# Altium PCB PowerConverterPCB.PcbDoc
Units mil, origin at the board's own origin, x right, y up, seen from the top; angles counter-clockwise.
Board outline 965 x 350 mil, 2 copper layers (Top Layer, Bottom Layer); 5 components, 3 nets, 17 pads, 5 vias.
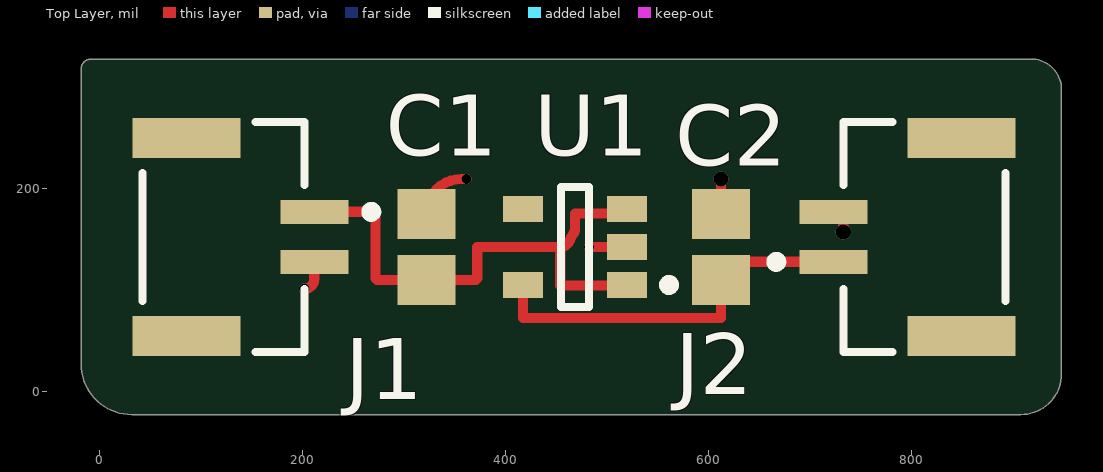
[diagram p0: Top Layer view]
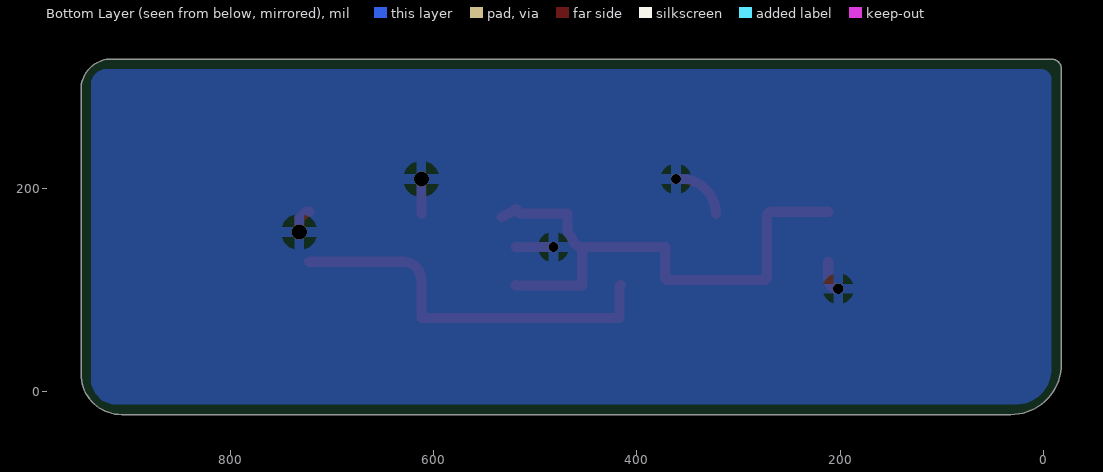
[diagram p1: Bottom Layer view, seen from below]
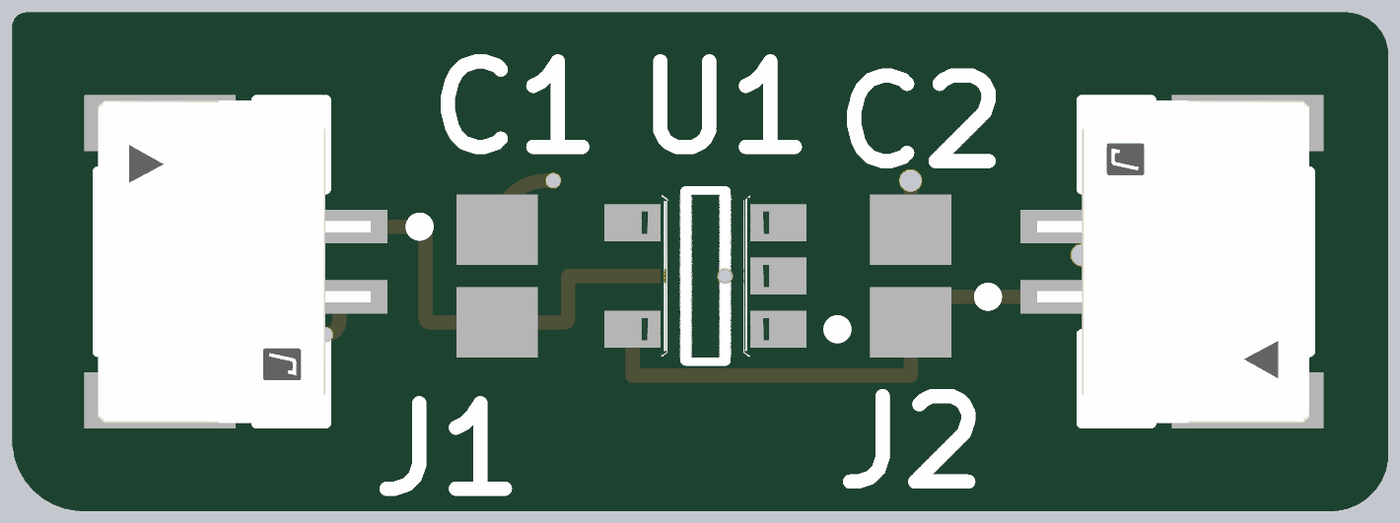
[diagram p2: 3D render of the assembled board from above, using the file's embedded part models]

## Layer stack, top to bottom
Top Solder: solder mask 0.4, Solder Resist, Dk 3.5
Top Layer: signal copper 1.4
Dielectric 1: dielectric 12.6, FR-4, Dk 4.8
Bottom Layer: signal copper 1.4
Bottom Solder: solder mask 0.4, Solder Resist, Dk 3.5

## Board outline
-17.81,27.31 ccw(c32.19,27.31) 32.19,-22.69 907.19,-22.69 ccw(c907.19,17.31) 947.19,17.31 947.19,297.31 ccw(c917.19,297.31) 917.19,327.31 -7.81,327.31 ccw(c-7.81,317.31) -17.81,317.31

## Design rules (kind name [scope] priority, off if disabled: settings)
Clearance [All] p1: gap=10 ignorepadtopadclearanceinfootprint=FALSE
PolygonConnect [All] p1: connectstyle=Relief reliefconductorwidth=10 reliefentries=4 polygonreliefangle="90 Angle" airgapwidth=10
RoutingVias [All] p1: holewidth=28 width=50 viastyle="Through Hole" minholewidth=28 minwidth=50 maxholewidth=28 maxwidth=50
SolderMaskExpansion [All] p1: expansion=0 istentingtop=FALSE
SupplyNets "Schematic Supply Nets_2" [InNet('+5v')] p1: voltage=0.000
SupplyNets "Schematic Supply Nets_1" [InNet('GND')] p2: voltage=0.000
SupplyNets "Schematic Supply Nets" [InNet('+3.3v')] p3: voltage=0.000
Width [All] p1: maxlimit=10 minlimit=10 preferedwidth=10
30 further rules are at their usual default settings.

## Components (designator, comment, footprint, x,y, rotation, side; value= is the part's Value field where it differs from the comment)
C1 "1uf" CAPC2013X145X50NL20T20 322.19,142.31 r270 top
C2 "1uf" CAPC2013X145X50NL20T20 612.19,142.31 r270 top
J1 "SM02B-GHS-TB(LF)(SN)" FP-SM02B-GHS-TB_LF_SN-MFG 122.19,152.31 r270 top
J2 "SM02B-GHS-TB(LF)(SN)" FP-SM02B-GHS-TB_LF_SN-MFG 812.19,152.31 r90 top
U1 "MIC5317-3.3YM5-TR" FP-SOT23-5LD-PL-1-MFG 468.39,142.31 r180 top

## Footprints (in the part's own frame and the unit in brackets; to place one, negate y for a bottom-side part, rotate by r counter-clockwise, add the part's x,y. Pads: shape width x height; smd on the part's side, far side on the other; paste and mask are expansions set on the pad)
CAPC2013X145X50NL20T20 [mm] "Chip Capacitor, 2-Leads, Body 2.00x1.25mm, IPC Medium Density"
  rect 1.25x1.45 smd: 1(-0.825,0) 2(0.825,0)
  body extent -1.1,-0.72 1.1,0.72, height 1.45
FP-SM02B-GHS-TB_LF_SN-MFG [mm]
  rect 0.6x1.7 smd paste+0 mask+0: 1(-0.625,2.275) 2(0.625,2.275)
  rect 1x2.7 smd paste+0 mask+0: 3(-2.475,-0.925) 4(2.475,-0.925)
  silkscreen extent -2.88,-2.02 2.88,3.83, body extent -3.08,-2.37 3.08,3.22, height 0.25
FP-SOT23-5LD-PL-1-MFG [mm]
  rect 1x0.66 smd paste+0 mask+0: 1(-1.3,0.95) 2(-1.3,0) 3(-1.3,-0.95) 4(1.3,-0.95) 5(1.3,0.95)
  silkscreen extent -2.48,-1.5 0.35,1.5, body extent -1.9,-1.6 1.9,1.6, height 0.25

## Part data
C1 C2: library part CMP-2007-01676-1, Manufacturer=Vitramon, Part Number=1uf
J1 J2: library part CMP-2000-07076-2, "CONN HEADER SMD R/A 2POS 1.25MM", Color=Natural, Current Rating=1A, Package Quantity=2500, Voltage Rating=50V, Connector Type="Outer Shroud Contact", Contact Material=Bronze, Contact Plating=Tin, Contact Type="Male Pin", Fastening Type=Latch, Housing Color=Natural, Housing Material=Nylon, Lead Free="Lead Free", Mount="Surface Mount", Number of Contacts=2, Number of Positions=2, Number of Rows=1, Orientation="Right Angle", Packaging="Tape and Reel", Pitch=0.049inch, Series=GH, Termination=Solder
U1: library part CMP-06324-000116-1, "IC REG LINEAR 3.3V 150MA SOT23-5", Case/Package=SOT-23-5, Dropout Voltage=155mV, Max Input Voltage=6V, Max Operating Temperature=125°C, Min Current Limit=200mA, Min Input Voltage=2.5V, Min Operating Temperature=-40°C, Output Current=150mA, Output Voltage=3.3V, Package Quantity=3000, Power Supply Rejection Ratio (PSRR)=70dB, Mount="Surface Mount", Number of Outputs=1, Number of Regulators=1, Packaging="Tape and Reel", RoHS Compliant=No, Series=-

## Via types
v1: diameter 10, hole 10, Top Layer to Bottom Layer, 3 vias
v2: diameter 15, hole 15, Top Layer to Bottom Layer, 2 vias

## Nets (pads, with @x,y where several pads share a name; then routed paths per layer and width w, separated by ;. In a path a pad name is that pad's centre, name@x,y a point inside that pad or via, vN(x,y) a via of type N, cw(c..) or ccw(c..) an arc to the next point about the centre after c; other vN are vias at no path point)
+3.3v: C2.2 J2.1 U1.5 | length 386.4
  Top Layer w10: U1.5@416.01,104.91 cw(c416.01,103.73) 417.19,103.73 417.19,72.31 612.19,72.31 C2.2 cw(c630.06,109.83) 630.06,127.7 J2.1
+5v: C1.2 J1.1 U1.1 U1.3 | length 551.1
  Top Layer w10: J1.1 267.19,176.92 267.19,177.31 cw(c267.19,172.31) 272.19,172.31 272.19,112.31 ccw(c274.67,112.31) 274.67,109.83 C1.2 369.71,109.83 ccw(c369.71,112.31) 372.19,112.31 372.19,142.31 453.89,142.31 ; U1.1 519.57,104.53 453.89,104.53 453.89,142.31 ; U1.3@533.05,171.72 518.37,179.71 cw(c513.78,179.71) 513.78,175.12 468.39,175.12 468.39,160.6 cw(c458.39,160.6) 466.32,154.51 ccw(c482.17,142.31) 463.32,149 cw(c453.89,152.31) 453.89,142.31
GND: C1.1 C2.1 J1.2 J2.2 U1.2 | length 188.8
  Top Layer w10: v1(201.91,101.13) ccw(c201.91,110.97) 211.75,110.97 J1.2 ; C1.1 cw(c356.64,174.79) 356.64,209.24 v1(361.56,209.24) ; v1(482.17,142.31) U1.2 ; C2.1 v2(612.19,209.24) ; J2.2 725.65,176.92 732.46,170.11 v2(732.46,157.02)
pads on no net: J1.3 J1.4 J2.3 J2.4 U1.4

## Polygon pours and split planes (outlines as drawn)
GND on Bottom Layer "GND_L02_P000" (solid, pour order 0): -7.81,27.31 -7.81,307.31 cw(c2.19,307.31) 2.19,317.31 922.19,317.31 cw(c922.19,302.31) 937.19,302.31 937.19,12.31 cw(c912.19,12.31) 912.19,-12.69 27.19,-12.69 cw(c27.19,22.31) -7.81,22.31 -7.81,32.31 ccw(c-12.81,32.31) -12.81,37.31

## Silkscreen, mask and mechanical layers (free items; w line width, h text height)
Mechanical 15:
  the board outline again, w10